# EAGLE board Livrable 4 COFFIN , PESSONNIER, PISTRE, PETIBOIS (EAGLE 7.6.0)

Size 73.58 x 76.09 mm. Coordinates in mm from the lower left corner, seen from the top.
Outline: 0,0 56.82,0 56.82,53.33 0,53.33 0,0
Copper layers (1*16): Top 0.035mm / dielectric 1.5mm / Bottom 0.035mm
Design rules "default": minimum track width 10mil, minimum drill 24mil, track to track 8mil, track to pad 8mil, pad to pad 8mil, via to via 8mil, smd to smd 8mil, copper to edge 40mil, drill to drill 8mil, minimum pad ring 10mil, minimum via ring 8mil, stop-mask expansion 4mil, vias tented up to drill 0mil, thermal gap 10mil

## Footprints (pad centres in the part's own frame; a part is rotated, then mirrored left to right if it is on the bottom)
LED5MM = drill 0.813 octagon: A -1.27,0; K 1.27,0
1X8P-2.54-2.54-11.6-3.0-BLACK-MALE = drill 0.889 pad 1.651 square: 1 0,8.89 | drill 0.889 pad 1.651: 2 0,6.35; 3 0,3.81; 4 0,1.27; 5 0,-1.27; 6 0,-3.81; 7 0,-6.35; 8 0,-8.89
2P-2.54-65/35MIL = drill 0.889 pad 1.651 square: 1 0,1.27 | drill 0.889 pad 1.651: 2 0,-1.27
0207/10 = drill 0.813 octagon: 1 -5.08,0; 2 5.08,0
DIP04YL = drill 0.813 long: 1 -3.81,-3.81; 2 -1.27,-3.81; 3 1.27,-3.81; 4 3.81,-3.81; 5 3.81,3.81; 6 1.27,3.81; 7 -1.27,3.81; 8 -3.81,3.81
TO92 = drill 0.813 octagon: 1 1.27,0; 2 0,1.905; 3 -1.27,0
1X16P-2.54-2.54-11.6-3.0-BLACK-MALE = drill 0.889 pad 1.651 square: 1 0,19.05 | drill 0.889 pad 1.651: 2 0,16.51; 3 0,13.97; 4 0,11.43; 5 0,8.89; 6 0,6.35; 7 0,3.81; 8 0,1.27; 9 0,-1.27; 10 0,-3.81; 11 0,-6.35; 12 0,-8.89; 13 0,-11.43; 14 0,-13.97; 15 0,-16.51; 16 0,-19.05
ARDUINO_UNO = drill 1.016 pad 1.88: 0 63.5,50.8; 1 60.96,50.8; 2 58.42,50.8; 3 55.88,50.8; 3.3V 35.56,2.54; 4 53.34,50.8; 5 50.8,50.8; 5V 38.1,2.54; 6 48.26,50.8; 7 45.72,50.8; 8 41.656,50.8; 9 39.116,50.8; 10 36.576,50.8; 11 34.036,50.8; 12 31.496,50.8; 13 28.956,50.8; A0 50.8,2.54; A1 53.34,2.54; A2 55.88,2.54; A3 58.42,2.54; A4 60.96,2.54; A5 63.5,2.54; AREF 23.876,50.8; GND 26.416,50.8; GND. 43.18,2.54; GND.. 40.64,2.54; I/OREF 30.48,2.54; N/C 27.94,2.54; RESET 33.02,2.54; SCL 18.796,50.8; SDA 21.336,50.8; VIN 45.72,2.54 | hole 3.2: 66.04,7.62; 66.04,35.56; 15.24,50.8; 13.97,2.54

## Placement (x,y rotation side)
D2  [LED5MM]  5,73.58 0 top
D3  [LED5MM]  5,86.28 0 top  (outside the outline)
D4  [LED5MM]  5,98.98 0 top  (outside the outline)
D5  [LED5MM]  5,111.68 0 top  (outside the outline)
KEYPAD1  [1X8P-2.54-2.54-11.6-3.0-BLACK-MALE]  5,48.18 0 top
P1  5V  [2P-2.54-65/35MIL]  5,60.88 0 top
R1  1000‎Ω  [0207/10]  5,35.48 0 top
R2  10k‎Ω  [0207/10]  5,137.08 0 top  (outside the outline)
R3  10k‎Ω  [0207/10]  5,149.78 0 top  (outside the outline)
R4  4.7k‎Ω  [0207/10]  5,162.48 0 top  (outside the outline)
R5  10k‎Ω  [0207/10]  5,200.58 0 top  (outside the outline)
R6  200‎Ω  [0207/10]  5,251.38 0 top  (outside the outline)
SW1  [DIP04YL]  5,124.38 0 top  (outside the outline)
SW2  [DIP04YL]  5,238.68 0 top  (outside the outline)
T1  [TO92]  5,175.18 0 top  (outside the outline)
T2  [TO92]  5,187.88 0 top  (outside the outline)
T3  [TO92]  5,213.28 0 top  (outside the outline)
T4  [TO92]  5,225.98 0 top  (outside the outline)
U1  [1X16P-2.54-2.54-11.6-3.0-BLACK-MALE]  5,10.08 0 top
U2  [ARDUINO_UNO]  5,22.78 0 top

## Library data of the parts
D2-D5 KEYPAD1 P1 R1-R6 SW1 SW2 T1-T4 U1 U2 = AUTODESK_CIRCUITS_BREADBOARD

## Nets
N$1: U1.2 U1.15 U2.5V
N$2: U1.4 U2.12
N$3: U1.6 U2.11
N$4: U1.9
N$5: U1.10
N$6: U1.11 U2.5
N$7: U1.12 U2.4
N$8: U1.13 U2.3
N$9: R1.1 U1.16
N$10: U1.7
N$11: U1.8
N$12: U1.14 U2.2
N$13: R1.2 SW2.5 U1.1 U1.3 U1.5 U2.GND.
N$14: KEYPAD1.5 U2.A0
N$15: KEYPAD1.6 U2.A1
N$16: KEYPAD1.7 U2.A2
N$17: KEYPAD1.8 U2.A3
N$18: KEYPAD1.1 U2.9
N$19: KEYPAD1.2 U2.8
N$20: KEYPAD1.3 U2.7
N$21: KEYPAD1.4 U2.6
N$22: D2.K D3.A
N$23: D4.K
N$24: D4.A
N$25: D5.K
N$26: D5.A
N$27: P1.2 R4.1 R6.2 SW1.1 SW1.2 SW1.3 SW1.4
N$28: R5.2 SW1.8 T3.2
N$29: R5.1 SW1.5
N$30: R3.1 SW1.6
N$31: R2.1 SW1.7
N$32: R2.2 T1.2
N$33: R3.2 T2.2
N$34: R4.2 T1.3 T4.2
N$35: T1.1 T2.3
N$36: D3.K P1.1 T2.1 T3.1 T4.1 U2.GND..
N$37: SW2.1 SW2.2 SW2.3 SW2.4
N$38: SW2.8 U2.13
N$39: SW2.7 U2.A4
N$40: SW2.6 U2.A5
N$41: D2.A R6.1 T3.3 T4.3 U2.10

## Tracks (layer width: path | path; a pad name or v marks a point on that pad's centre or on a via)
N$1  (2 unrouted)
N$2  (1 unrouted)
N$3  (1 unrouted)
N$6  (1 unrouted)
N$7  (1 unrouted)
N$8  (1 unrouted)
N$9  (1 unrouted)
N$12  (1 unrouted)
N$13  (5 unrouted)
N$14  (1 unrouted)
N$15  (1 unrouted)
N$16  (1 unrouted)
N$17  (1 unrouted)
N$18  (1 unrouted)
N$19  (1 unrouted)
N$20  (1 unrouted)
N$21  (1 unrouted)
N$22  (1 unrouted)
N$27  (6 unrouted)
N$28  (2 unrouted)
N$29  (1 unrouted)
N$30  (1 unrouted)
N$31  (1 unrouted)
N$32  (1 unrouted)
N$33  (1 unrouted)
N$34  (2 unrouted)
N$35  (1 unrouted)
N$36  (5 unrouted)
N$37  (3 unrouted)
N$38  (1 unrouted)
N$39  (1 unrouted)
N$40  (1 unrouted)
N$41  (4 unrouted)